# Altium PCB BLE_KB.PcbDoc
Units mil, origin at the board's own origin, x right, y up, seen from the top; angles counter-clockwise.
Board outline 13766.26 x 4875 mil, 2 copper layers (Top Layer, Bottom Layer); 124 components, 42 nets, 632 pads, 114 vias.
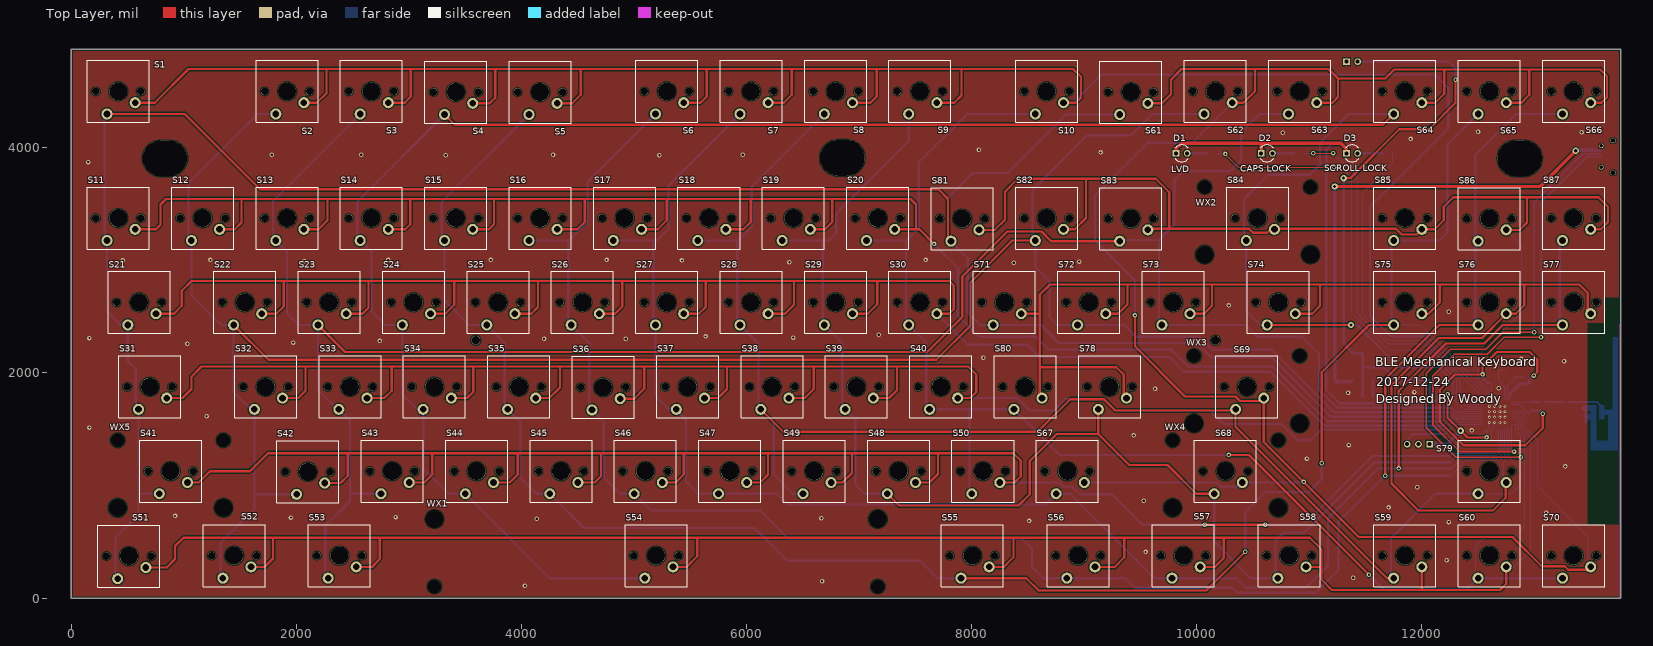
[diagram p0: Top Layer view]
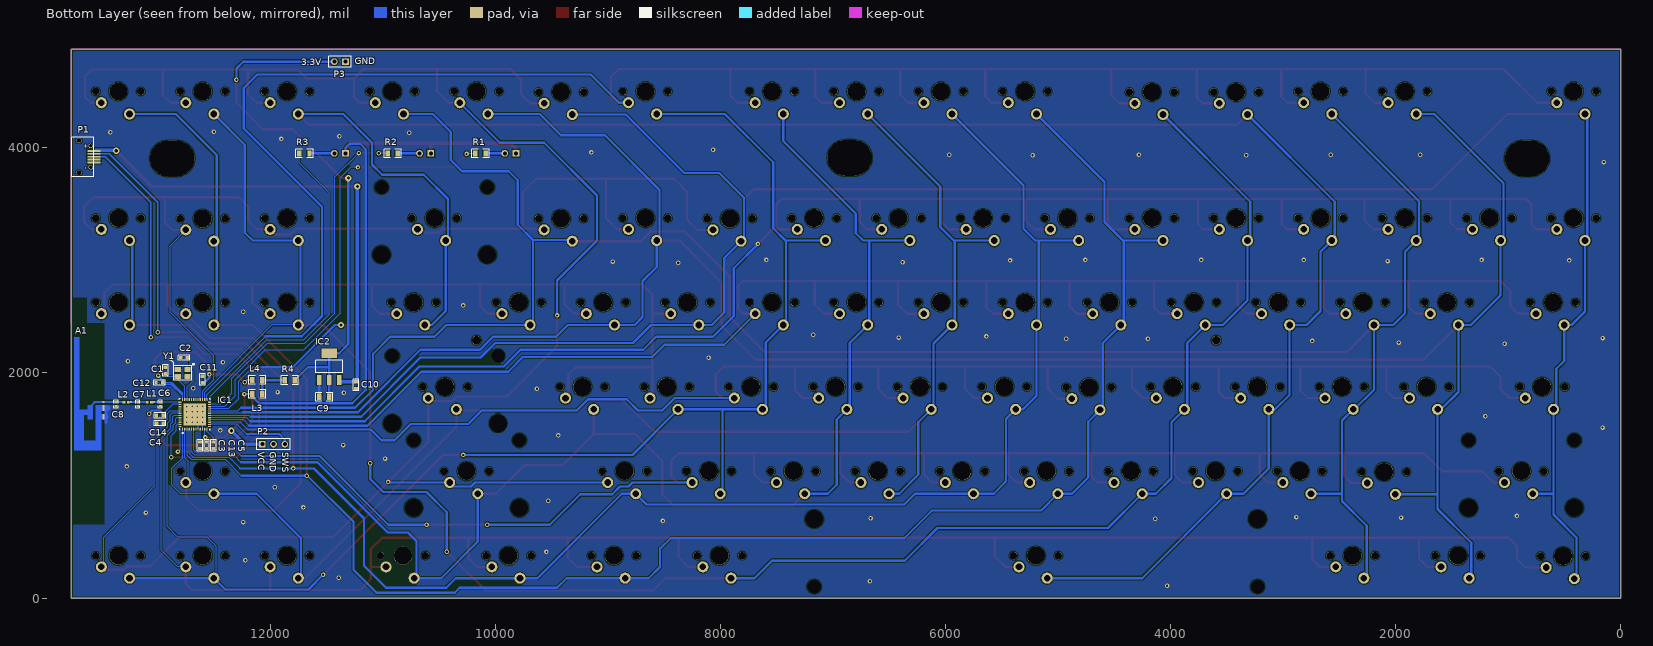
[diagram p1: Bottom Layer view, seen from below]
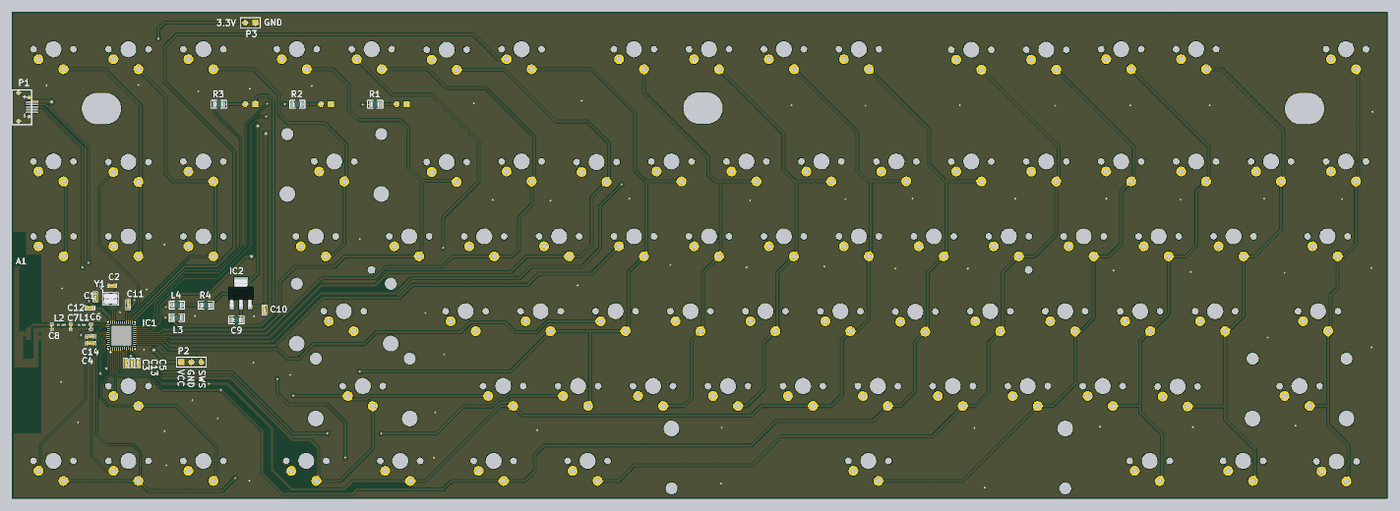
[diagram p2: 3D render of the assembled board from below, using the file's embedded part models]

## Layer stack, top to bottom
Top Solder: solder mask 0.4, Solder Resist, Dk 3.5
Top Layer: signal copper 1.4
Dielectric 1: dielectric 12.6, FR-4, Dk 4.8
Bottom Layer: signal copper 1.4
Bottom Solder: solder mask 0.4, Solder Resist, Dk 3.5

## Board outline
0,0 0,4875 13766.26,4875 13766.26,0

## Design rules (kind name [scope] priority, off if disabled: settings)
Clearance Antenna3 [InNet('NetC6_1')] p1: gap=17.72 ignorepadtopadclearanceinfootprint=FALSE
Clearance Antenna2 [InNet('NetC7_1')] p2: gap=17.72 ignorepadtopadclearanceinfootprint=FALSE
Clearance Antenna [InNet('NetA1_1')] p3: gap=17.72 ignorepadtopadclearanceinfootprint=FALSE
Clearance [All] p4: gap=10 ignorepadtopadclearanceinfootprint=FALSE
PolygonConnect Via [IsVia] p1: connectstyle=Direct reliefconductorwidth=10 reliefentries=4 polygonreliefangle="90 Angle" airgapwidth=10
PolygonConnect [All] p2: connectstyle=Relief reliefconductorwidth=10 reliefentries=4 polygonreliefangle="90 Angle" airgapwidth=10
RoutingVias [All] p1: holewidth=20 width=40 viastyle="Through Hole" minholewidth=10 minwidth=20 maxholewidth=50 maxwidth=100
SolderMaskExpansion [All] p1: expansion=4
Width [All] p1: maxlimit=100 minlimit=10 preferedwidth=10
30 further rules are at their usual default settings.

## Components (designator, comment, footprint, x,y, rotation, side; value= is the part's Value field where it differs from the comment)
A1 "Antenna" ANT_IFA_TI_DN0007 13480.53,1675.85 r90 bottom
C1 "Cap" C603_4MOD 12930.63,2021.85 r90 bottom value=30pF
C2 "Cap" C603_4MOD 12765.63,2136.85 r0 bottom value=30pF
C3 "Cap" C603_4MOD 12625.63,1356.85 r270 bottom value=1uF
C4 "Cap" C603_4MOD 12980.63,1551.85 r180 bottom value=1uF
C5 "Cap" C603_4MOD 12505.63,1356.85 r270 bottom value=10uF
C6 "Cap" C402_4MOD 12975.63,1721.85 r270 bottom value=1.5pF
C7 "Cap" C402_4MOD 13175.63,1721.85 r270 bottom value=1.5pF
C8 "NC" C402_4MOD 13370.63,1721.85 r270 bottom value=1.5pF
C9 "Cap" L0805_POWER_4MOD 11520.63,1786.85 r0 bottom value=10uF
C10 "Cap" C603_4MOD 11240.63,1891.85 r270 bottom value=1uF
C11 "Cap" C603_4MOD 12600.63,1941.85 r90 bottom value=0.1uF
C12 "Cap" C603_4MOD 12985.63,1911.85 r180 bottom value=0.1uF
C13 "Cap" C603_4MOD 12565.63,1356.85 r270 bottom value=0.1uF
C14 "Cap" C603_4MOD 12979.98,1623.5 r0 bottom value=0.1uF
D1 "LED2" 3.8mm 9865.63,3951.85 r0 top
D2 "LED2" 3.8mm 10623.13,3951.85 r0 top
D3 "LED2" 3.8mm 11380.63,3951.85 r0 top
IC1 "TLSR8267F512ET48" QFN7X7-48 12670.63,1631.85 r180 bottom
IC2 "AMS1117-3.3" SOT-223 11475.63,2056.85 r270 bottom
L1 "Inductor" 0402-A 13074.63,1740.85 r0 bottom value=3.3nH
L2 "Inductor" 0402-A 13280.31,1740.85 r0 bottom value=0R
L3 "Inductor" L0805_POWER_4MOD 12115.63,1811.85 r0 bottom value=470R
L4 "Inductor" L0805_POWER_4MOD 12115.63,1936.85 r0 bottom value=470R
P1 "Micro USB" MICROUSB 13598.58,3973.51 r90 bottom
P2 "Download" HDR1X3 12070.63,1366.85 r180 bottom
P3 "Battery" HDR1X2 11330.63,4766.85 r0 bottom
R1 "Res1" L0805_POWER_4MOD 10130.63,3951.85 r180 bottom value=560
R2 "Res1" L0805_POWER_4MOD 10910.63,3951.85 r180 bottom value=560
R3 "Res1" L0805_POWER_4MOD 11695.63,3951.85 r180 bottom value=560
R4 "Res1" L0805_POWER_4MOD 11825.63,1936.85 r180 bottom value=1R
S1 "SW-PB" MX_SW-4 415.63,4501.85 r0 top
S2 "SW-PB" MX_SW-4 1915.63,4501.85 r0 top
S3 "SW-PB" MX_SW-4 2665.63,4501.85 r0 top
S4 "SW-PB" MX_SW-4 3415.63,4496.85 r0 top
S5 "SW-PB" MX_SW-4 4165.63,4496.85 r0 top
S6 "SW-PB" MX_SW-4 5290.63,4501.85 r0 top
S7 "SW-PB" MX_SW-4 6040.63,4501.85 r0 top
S8 "SW-PB" MX_SW-4 6790.63,4501.85 r0 top
S9 "SW-PB" MX_SW-4 7540.63,4501.85 r0 top
S10 "SW-PB" MX_SW-4 8665.63,4501.85 r0 top
S11 "SW-PB" MX_SW-4 415.63,3376.85 r0 top
S12 "SW-PB" MX_SW-4 1165.63,3376.85 r0 top
S13 "SW-PB" MX_SW-4 1915.63,3376.85 r0 top
S14 "SW-PB" MX_SW-4 2665.63,3376.85 r0 top
S15 "SW-PB" MX_SW-4 3415.63,3376.85 r0 top
S16 "SW-PB" MX_SW-4 4165.63,3376.85 r0 top
S17 "SW-PB" MX_SW-4 4915.63,3376.85 r0 top
S18 "SW-PB" MX_SW-4 5665.63,3376.85 r0 top
S19 "SW-PB" MX_SW-4 6415.63,3376.85 r0 top
S20 "SW-PB" MX_SW-4 7165.63,3376.85 r0 top
S21 "SW-PB" MX_SW-4 600.63,2626.85 r0 top
S22 "SW-PB" MX_SW-4 1540.63,2626.85 r0 top
S23 "SW-PB" MX_SW-4 2290.63,2626.85 r0 top
S24 "SW-PB" MX_SW-4 3040.63,2626.85 r0 top
S25 "SW-PB" MX_SW-4 3790.63,2626.85 r0 top
S26 "SW-PB" MX_SW-4 4540.63,2626.85 r0 top
S27 "SW-PB" MX_SW-4 5290.63,2626.85 r0 top
S28 "SW-PB" MX_SW-4 6040.63,2626.85 r0 top
S29 "SW-PB" MX_SW-4 6790.63,2626.85 r0 top
S30 "SW-PB" MX_SW-4 7540.63,2626.85 r0 top
S31 "SW-PB" MX_SW-4 695.63,1876.85 r0 top
S32 "SW-PB" MX_SW-4 1725.63,1876.85 r0 top
S33 "SW-PB" MX_SW-4 2475.63,1876.85 r0 top
S34 "SW-PB" MX_SW-4 3225.63,1876.85 r0 top
S35 "SW-PB" MX_SW-4 3975.63,1876.85 r0 top
S36 "SW-PB" MX_SW-4 4725.63,1871.85 r0 top
S37 "SW-PB" MX_SW-4 5475.63,1876.85 r0 top
S38 "SW-PB" MX_SW-4 6225.63,1876.85 r0 top
S39 "SW-PB" MX_SW-4 6975.63,1876.85 r0 top
S40 "SW-PB" MX_SW-4 7725.63,1876.85 r0 top
S41 "SW-PB" MX_SW-4 880.63,1126.85 r0 top
S42 "SW-PB" MX_SW-4 2100.63,1121.85 r0 top
S43 "SW-PB" MX_SW-4 2850.63,1126.85 r0 top
S44 "SW-PB" MX_SW-4 3600.63,1126.85 r0 top
S45 "SW-PB" MX_SW-4 4350.63,1126.85 r0 top
S46 "SW-PB" MX_SW-4 5100.63,1126.85 r0 top
S47 "SW-PB" MX_SW-4 5850.63,1126.85 r0 top
S48 "SW-PB" MX_SW-4 7350.63,1126.85 r0 top
S49 "SW-PB" MX_SW-4 6600.63,1126.85 r0 top
S50 "SW-PB" MX_SW-4 8100.63,1126.85 r0 top
S51 "SW-PB" MX_SW-4 510.63,371.85 r0 top
S52 "SW-PB" MX_SW-4 1445.63,376.85 r0 top
S53 "SW-PB" MX_SW-4 2380.63,376.85 r0 top
S54 "SW-PB" MX_SW-4 5195.63,376.85 r0 top
S55 "SW-PB" MX_SW-4 8005.63,376.85 r0 top
S56 "SW-PB" MX_SW-4 8945.63,376.85 r0 top
S57 "SW-PB" MX_SW-4 9880.63,376.85 r0 top
S58 "SW-PB" MX_SW-4 10820.63,376.85 r0 top
S59 "SW-PB" MX_SW-4 11850.63,376.85 r0 top
S60 "SW-PB" MX_SW-4 12600.63,376.85 r0 top
S61 "SW-PB" MX_SW-4 9415.63,4496.85 r0 top
S62 "SW-PB" MX_SW-4 10165.63,4501.85 r0 top
S63 "SW-PB" MX_SW-4 10915.63,4501.85 r0 top
S64 "SW-PB" MX_SW-4 11850.63,4501.85 r0 top
S65 "SW-PB" MX_SW-4 12600.63,4501.85 r0 top
S66 "SW-PB" MX_SW-4 13350.63,4501.85 r0 top
S67 "SW-PB" MX_SW-4 8850.63,1126.85 r0 top
S68 "SW-PB" MX_SW-4 10255.63,1126.85 r0 top
S69 "SW-PB" MX_SW-4 10445.63,1876.85 r0 top
S70 "SW-PB" MX_SW-4 13350.63,376.85 r0 top
S71 "SW-PB" MX_SW-4 8290.63,2626.85 r0 top
S72 "SW-PB" MX_SW-4 9040.63,2626.85 r0 top
S73 "SW-PB" MX_SW-4 9790.63,2626.85 r0 top
S74 "SW-PB" MX_SW-4 10725.63,2626.85 r0 top
S75 "SW-PB" MX_SW-4 11850.63,2626.85 r0 top
S76 "SW-PB" MX_SW-4 12600.63,2626.85 r0 top
S77 "SW-PB" MX_SW-4 13350.63,2626.85 r0 top
S78 "SW-PB" MX_SW-4 9225.63,1876.85 r0 top
S79 "SW-PB" MX_SW-4 12600.63,1126.85 r0 top
S80 "SW-PB" MX_SW-4 8475.63,1876.85 r0 top
S81 "SW-PB" MX_SW-4 7915.63,3371.85 r0 top
S82 "SW-PB" MX_SW-4 8665.63,3376.85 r0 top
S83 "SW-PB" MX_SW-4 9415.63,3371.85 r0 top
S84 "SW-PB" MX_SW-4 10540.63,3376.85 r0 top
S85 "SW-PB" MX_SW-4 11850.63,3376.85 r0 top
S86 "SW-PB" MX_SW-4 12600.63,3371.85 r0 top
S87 "SW-PB" MX_SW-4 13350.63,3376.85 r0 top
WX1 "Comment" 1x6.25 5195.63,376.85 r180 top
WX2 "Comment" 1x2 10540.63,3376.85 r0 top
WX3 "Comment" 1x2 10445.63,1876.85 r0 top
WX4 "Comment" 1x2 10255.63,1126.85 r0 top
WX5 "Comment" 1x2 880.63,1126.85 r0 top
Y1 "XTAL" XTAL_SMD_3225(3.2X2.5) 12780.63,1996.85 r0 bottom

## Footprints (in the part's own frame and the unit in brackets; to place one, negate y for a bottom-side part, rotate by r counter-clockwise, add the part's x,y. Pads: shape width x height; smd on the part's side, far side on the other; paste and mask are expansions set on the pad)
1x2 [mil] "stab"
  round 0 hole 120: 0(-470,275) 3(470,275)
  round 0 hole 157: 1(-470,-325) 4(470,-325)
1x6.25 [mil] "stab"
  round 0 hole 120: 0(1970,275) 3(-1970,275)
  round 0 hole 157: 1(1970,-325) 4(-1970,-325)
3.8mm [mm]
  rect 1.5x1.5 hole 0.9: 1(-1.27,0)
  round 1.5 hole 0.9: 2(1.27,0)
  silkscreen extent -1.52,-1.9 1.52,1.9
0402-A [mm] "Chip Inductor, Body 1.0x0.5mm, IPC High Density"
  rect 0.6x0.5 smd: 1(-0.5,0) 2(0.5,0)
  silkscreen extent -1.1,-0.15 -1.1,0.15, body extent -0.55,-0.3 0.55,0.3, height 0.55
ANT_IFA_TI_DN0007 [mm]
  rect 0.45x0.45 smd paste-1 mask-1: 1(1.653,-0.002)
  rect 1.25x0.45 smd paste-1 mask-1: 2(-1.652,0.003) 2(0.333,-0.002)
  Top Layer region: -9.222,6.682 -0.041,6.682 -0.041,4.473 -9.222,4.473
  Top Layer region: -9.222,6.682 16.356,6.682 16.356,5.471 -9.222,5.471
  Top Layer region: -9.222,6.682 -7.036,6.682 -7.036,0.519 -9.222,0.519
  Top Layer region: -9.222,1.801 0.956,1.801 0.956,0.518 -9.222,0.518
  Top Layer region: -1.24,4.473 -0.041,4.473 -0.041,3.315 -1.24,3.315
  Top Layer region: -2.241,3.668 0.959,3.668 0.959,2.418 -2.241,2.418
  Top Layer region: 1.422,2.015 1.885,2.015 1.885,0.176 1.422,0.176
  Top Layer region: -0.293,0.538 0.956,0.538 0.956,0.2 -0.293,0.2
  Top Layer region: -2.276,0.68 -1.027,0.68 -1.027,0.2 -2.276,0.2
  Top Layer lines w0.46: 1.658,2.031 0.823,2.828
C402_4MOD [mil]
  rect 22x24 smd: 1(-19,0) 2(19,0)
  silkscreen extent -36,-18 36,18, body extent -21,-11 19,9, height 20
C603_4MOD [mil]
  rect 30x35 smd: 1(-29.35,1.65) 2(30.65,1.65)
  silkscreen extent -50,-22 52,26, body extent -40,-15 38,16, height 31
HDR1X2 [mm] "Connector; Header; 2 Position"
  rect 1.5x1.5 hole 0.9: 1(0,0)
  round 1.5 hole 0.9: 2(2.54,0)
  silkscreen extent -1.27,-1.27 3.81,1.27
HDR1X3 [mm] "Connector; Header; 3 Position"
  rect 1.5x1.5 hole 0.9: 1(0,0)
  round 1.5 hole 0.9: 2(2.54,0) 3(5.08,0)
  silkscreen extent -1.27,-1.27 6.35,1.27
L0805_POWER_4MOD [mm]
  rect 1x1.4 smd: 1(-1.16,-0.03) 2(1.126,-0.03)
  silkscreen extent -1.95,-1 1.92,0.95, body extent -1.05,-0.6 0.95,0.6, height 1
MICROUSB [mm]
  rect 0.4x3 smd: 1(0,-0.825) 2(-0.65,-0.825) 3(-1.3,-0.825) 4(-1.95,-0.825) 5(-2.6,-0.825)
  round 1 hole 0.8: 6(-3.725,-0.075) 7(1.125,-0.075)
  oval 1x1.3 hole 0.8 slot 1.1 at 90 deg: 8(-4.925,2.575) 9(2.325,2.575)
  silkscreen extent -5.77,-0.76 3.12,4.24
MX_SW-4 [mil] "with Fixation pins  1-Pole"
  round 98.43 hole 59.06: 1(150,-100) 2(-100,-200)
  round 67 hole 67: ""(-200,0) ""(200,0)
  round 160 hole 160: ""(0,0)
  silkscreen extent -276,-276 276,276
QFN7X7-48 [mm] "Quad Flat No Lead; 48 Terminals; Body 7 x 7 mm; Pitch 0.5 mm"
  rect 0.28x0.28 smd: 1(-2.75,-3.515) 2(-2.25,-3.515) 3(-1.75,-3.515) 4(-1.25,-3.515) 5(-0.75,-3.515) 6(-0.25,-3.515) 7(0.25,-3.515) 8(0.75,-3.515) 9(1.25,-3.515) 10(1.75,-3.515) 11(2.25,-3.515) 12(2.75,-3.515) 13(3.515,-2.75) 14(3.515,-2.25) 15(3.515,-1.75) 16(3.515,-1.25) 17(3.515,-0.75) 18(3.515,-0.25) 19(3.515,0.25) 20(3.515,0.75) 21(3.515,1.25) 22(3.515,1.75) 23(3.515,2.25) 24(3.515,2.75) 25(2.75,3.515) 26(2.25,3.515) 27(1.75,3.515) 28(1.25,3.515) 29(0.75,3.515) 30(0.25,3.515) 31(-0.25,3.515) 32(-0.75,3.515) 33(-1.25,3.515) 34(-1.75,3.515) 35(-2.25,3.515) 36(-2.75,3.515) 37(-3.515,2.75) 38(-3.515,2.25) 39(-3.515,1.75) 40(-3.515,1.25) 41(-3.515,0.75) 42(-3.515,0.25) 43(-3.515,-0.25) 44(-3.515,-0.75) 45(-3.515,-1.25) 46(-3.515,-1.75) 47(-3.515,-2.25) 48(-3.515,-2.75)
  oval 0.28x0.66 smd: 1(-2.75,-3.325) 2(-2.25,-3.325) 3(-1.75,-3.325) 4(-1.25,-3.325) 5(-0.75,-3.325) 6(-0.25,-3.325) 7(0.25,-3.325) 8(0.75,-3.325) 9(1.25,-3.325) 10(1.75,-3.325) 11(2.25,-3.325) 12(2.75,-3.325) 25(2.75,3.325) 26(2.25,3.325) 27(1.75,3.325) 28(1.25,3.325) 29(0.75,3.325) 30(0.25,3.325) 31(-0.25,3.325) 32(-0.75,3.325) 33(-1.25,3.325) 34(-1.75,3.325) 35(-2.25,3.325) 36(-2.75,3.325)
  oval 0.66x0.28 smd: 13(3.325,-2.75) 14(3.325,-2.25) 15(3.325,-1.75) 16(3.325,-1.25) 17(3.325,-0.75) 18(3.325,-0.25) 19(3.325,0.25) 20(3.325,0.75) 21(3.325,1.25) 22(3.325,1.75) 23(3.325,2.25) 24(3.325,2.75) 37(-3.325,2.75) 38(-3.325,2.25) 39(-3.325,1.75) 40(-3.325,1.25) 41(-3.325,0.75) 42(-3.325,0.25) 43(-3.325,-0.25) 44(-3.325,-0.75) 45(-3.325,-1.25) 46(-3.325,-1.75) 47(-3.325,-2.25) 48(-3.325,-2.75)
  rect 5x5 smd: 49(0,0)
  silkscreen extent -3.55,-4.33 3.55,3.55
SOT-223 [mm]
  rect 2.2x1 smd: 1(3,-2.3) 2(3,0) 3(3,2.3)
  rect 2.2x3.5 smd: 2(-3,0)
  silkscreen extent -1.4,-3 1.4,3, body extent -3.49,-3.24 3.49,3.24, height 1.64
XTAL_SMD_3225(3.2X2.5) [mm] "XTAL SMD CASE 3225"
  rect 1.4x1.2 smd: 1(-1.15,-0.875) 2(1.05,-0.875) 3(1.05,0.725) 4(-1.15,0.725)
  silkscreen extent -2.69,-2.25 1.97,1.58, body extent -1.68,-1.35 1.53,1.15, height 0.81

## Part data
C1 C2 C3 C4 C5 C6 C7 C9 C10 C11 C12 C13 C14: "Capacitor", LatestRevisionDate=17-Jul-2002, LatestRevisionNote="Re-released for DXP Platform.", PackageDescription="Radial Cap, Thru-Hole; 2 Leads; 0.3 in Pin Spacing", PackageReference=RAD-0.3, Published=8-Jun-2000, Publisher="Altium Limited"
C8: library part Cap, "Capacitor", LatestRevisionDate=17-Jul-2002, LatestRevisionNote="Re-released for DXP Platform.", PackageDescription="Radial Cap, Thru-Hole; 2 Leads; 0.3 in Pin Spacing", PackageReference=RAD-0.3, Published=8-Jun-2000, Publisher="Altium Limited"
D1 D2 D3: "Typical RED, GREEN, YELLOW, AMBER GaAs LED", LatestRevisionDate=17-Jul-2002, LatestRevisionNote="Re-released for DXP Platform.", PackageDescription="SM LED; 2 Flat Leads", PackageReference=3.2X1.6X1.1, PackageVersion=Feb-2002, Published=8-Jun-2000, Publisher="Altium Limited"
IC2: library part "Volt Reg", "Voltage Regulator", LatestRevisionDate=29-May-2009, LatestRevisionNote="IPC-7351 Footprint Added.", PackageDescription="3-Pin Transistor Outline Package 2.54 mm Pitch, 15.1 mm Lead Span", PackageReference=D2PAK, Published=24-Mar-1999, Publisher="Altium Limited"
P1: library part MHDR1X5, "Header, 5-Pin", LatestRevisionDate=17-Jul-2002, LatestRevisionNote="Re-released for DXP Platform.", Publisher="Altium Limited"
P2: library part "Header 3", "Header, 3-Pin", LatestRevisionDate=17-Jul-2002, LatestRevisionNote="Re-released for DXP Platform.", Publisher="Altium Limited"
P3: library part "Header 2", "Header, 2-Pin", LatestRevisionDate=17-Jul-2002, LatestRevisionNote="Re-released for DXP Platform.", Publisher="Altium Limited"
R1 R2 R3 R4: "Resistor", LatestRevisionDate=17-Jul-2002, LatestRevisionNote="Re-released for DXP Platform.", PackageDescription="Axial Device, Thru-Hole; 2 Leads; 0.3 in Pin Spacing", PackageReference=AXIAL-0.3, Published=8-Jun-2000, Publisher="Altium Limited"
S1 S2 S3 S4 S5 S6 S7 S8 S9 S10 S11 S12 S13 S14 S15 S16 S17 S18 S19 S20 S21 S22 S23 S24 S25 S26 S27 S28 S29 S30 S31 S32 S33 S34 S35 S36 S37 S38 S39 S40 S41 S42 S43 S44 S45 S46 S47 S48 S49 S50 S51 S52 S53 S54 S55 S56 S57 S58 S59 S60 S61 S62 S63 S64 S65 S66 S67 S68 S69 S70 S71 S72 S73 S74 S75 S76 S77 S78 S79 S80 S81 S82 S83 S84 S85 S86 S87: "Switch", LatestRevisionDate=17-Jul-2002, LatestRevisionNote="Re-released for DXP Platform.", PackageDescription="Switch; 2 Leads", PackageReference=SPST-2, Published=24-Mar-1999, Publisher="Altium Limited"
Y1: "Crystal Oscillator", LatestRevisionDate=17-Jul-2002, LatestRevisionNote="Re-released for DXP Platform.", PackageDescription="Crystal, Thru-Hole; 2 Leads; Body 3.1 x 8.2 mm (Dia.xH)", PackageReference=R38, Published=8-Jun-2000, Publisher="Altium Limited"
L1 L2 L3 L4: Code_IEC=1005, Code_JEITA=0402, LatestRevisionDate=29-May-2009, LatestRevisionNote="IPC-7351 Footprint Added.", PackageDescription="Chip Inductor", PackageReference=0402-A, Published=8-Jun-2000, Publisher="Altium Limited"

## Free pads (board coordinates)
  oval 393.7x314.96 hole 314.96 slot 393.7 at 0 deg: 0(830.63,3906.85) 1(6850.63,3911.85) 2(12870.63,3906.85)
  round 78.74 hole 78.74: 3(3592.52,2290.4) 4(10167.32,2290.4)

## Via types
v1: diameter 40, hole 20, Top Layer to Bottom Layer, tented both sides, 93 vias
v2: diameter 25.98, hole 12.99, Top Layer to Bottom Layer, tented both sides, 16 vias
v3: diameter 56, hole 28, Top Layer to Bottom Layer, tented both sides, 5 vias

## Nets (pads, with @x,y where several pads share a name; then routed paths per layer and width w, separated by ;. In a path a pad name is that pad's centre, name@x,y a point inside that pad or via, vN(x,y) a via of type N, cw(c..) or ccw(c..) an arc to the next point about the centre after c; other vN are vias at no path point)
AVDD: C11.1 C12.2 C14.1 IC1.28 IC1.36 IC1.38 L4.2 | length 4157.8
  Top Layer w20: v1(12995.63,1976.85) 13025.63,2006.85 13025.63,2121.85 12960.63,2186.85 12665.63,2186.85 12540.63,2061.85 v1(12540.63,1986.85) 12295.63,1986.85 v1(12225.63,1916.85) 12160.63,1851.85 12160.63,1566.85 12370.63,1356.85 12920.63,1356.85 13075.63,1511.85 v1(13075.63,1636.85)
  Bottom Layer w10: C11.1@12609.98,1908.5 12621.42,1897.06 12621.42,1770.24 IC1.28@12621.42,1762.76 ; IC1.36@12778.9,1762.76 12778.9,1770.24 12778.9,1796.85 ; IC1.38@12801.54,1720.44 12809.02,1720.44 12867.05,1720.44 C14.1@12950.63,1636.85 ; C12.2 12872.28,1913.5 12778.9,1820.12 12778.9,1806.85 ; 12778.9,1796.85 12778.9,1806.85 ; 12778.9,1796.85 12878.9,1896.85 12938.33,1896.85 12948.33,1906.85 12878.9,1906.85 12778.9,1806.85
  Bottom Layer w20: L4.2 12204.45,1938.03 v1(12225.63,1916.85) ; v1(12540.63,1986.85) 12540.63,1956.85 12584.98,1912.51 C11.1 ; C14.1@12950.63,1636.85 12980.63,1666.85 13050.63,1666.85 13075.63,1641.85 v1(13075.63,1636.85) ; C12.2 12954.98,1936.2 v1(12995.63,1976.85)
Col1: IC1.18 S1.2 S11.2 S21.2 S31.2 S41.2 S51.2 S61.2 S71.2 S81.2 | length 20637.4
  Top Layer w20: S1.2 1005.63,4301.85 1675.63,3631.85 7705.63,3631.85 7790.63,3546.85 7790.63,3196.85 S81.2
  Bottom Layer w10: 12175.63,1611.85 12185.79,1622.01 12532.24,1622.01 IC1.18@12539.72,1622.01
  Bottom Layer w20: S1.2 295.63,4281.85 295.63,3196.85 S11.2 315.63,2546.85 435.63,2426.85 S21.2 500.63,2106.85 570.63,2036.85 570.63,1701.85 S31.2 595.63,926.85 ; S51.2 390.63,191.85 390.63,536.85 595.63,741.85 595.63,926.85 ; S41.2 595.63,926.85 ; S61.2 8840.63,4296.85 8320.63,3776.85 8010.63,3776.85 7790.63,3556.85 7790.63,3196.85 S81.2 7965.63,3021.85 7965.63,2536.85 8075.63,2426.85 S71.2 8615.63,2426.85 8775.63,2266.85 10000.63,2266.85 10130.63,2136.85 10665.63,2136.85 11190.63,1611.85 12175.63,1611.85
Col2: IC1.19 S2.2 S12.2 S22.2 S32.2 S42.2 S52.2 S62.2 S72.2 S82.2 | length 20491.7
  Top Layer w20: S22.2 1750.63,2116.85 7685.63,2116.85 7990.63,2421.85 7990.63,2806.85 8360.63,3176.85 S82.2
  Bottom Layer w10: 12245.63,1651.85 12255.79,1641.7 12532.24,1641.7 IC1.19@12539.72,1641.7
  Bottom Layer w20: S52.2 1325.63,196.85 1325.63,491.85 1625.63,791.85 1625.63,916.85 ; S2.2 1655.63,4301.85 1040.63,3686.85 1040.63,3201.85 S12.2 1065.63,2691.85 1330.63,2426.85 S22.2 1440.63,1831.85 1595.63,1676.85 S32.2 1625.63,916.85 ; S42.2 1630.63,921.85 1625.63,916.85 ; S62.2 9605.63,4301.85 9415.63,4111.85 9025.63,4111.85 8540.63,3626.85 8540.63,3201.85 S82.2 8565.63,2941.85 8690.63,2816.85 8690.63,2496.85 8760.63,2426.85 S72.2 9355.63,2426.85 9460.63,2321.85 10020.63,2321.85 10135.63,2206.85 10665.63,2206.85 11220.63,1651.85 12245.63,1651.85
Col3: IC1.20 S3.2 S13.2 S23.2 S33.2 S43.2 S53.2 S63.2 S73.2 S83.2 | length 19590.3
  Top Layer w20: S23.2 2430.63,2186.85 7605.63,2186.85 7915.63,2496.85 7915.63,2856.85 8315.63,3256.85 8620.63,3256.85 8705.63,3171.85 S83.2
  Bottom Layer w10: 12260.63,1691.85 12291.1,1661.38 12532.24,1661.38 IC1.20@12539.72,1661.38
  Bottom Layer w20: S53.2 2255.63,201.85 2255.63,641.85 2475.63,861.85 2475.63,926.85 ; S3.2 1790.63,3526.85 1790.63,3201.85 S13.2 1915.63,3076.85 1915.63,2531.85 2020.63,2426.85 S23.2 2190.63,1851.85 2365.63,1676.85 S33.2 2475.63,1576.85 2475.63,926.85 ; S43.2 2475.63,926.85 ; S83.2 9325.63,3181.85 9665.63,3181.85 ; S63.2 10555.63,4301.85 10395.63,4141.85 10395.63,3891.85 10295.63,3791.85 9880.63,3791.85 9800.63,3711.85 9800.63,3316.85 9665.63,3181.85 ; 12260.63,1691.85 11245.63,1691.85 11085.63,1851.85 11085.63,2171.85 10935.63,2321.85 10540.63,2321.85 10435.63,2426.85 S73.2 9665.63,2451.85 9665.63,3181.85
Col4: IC1.21 S4.2 S14.2 S24.2 S34.2 S44.2 S54.2 S64.2 S74.2 S84.2 | length 20024.7
  Top Layer w20: S4.2 3405.63,4206.85 11655.63,4206.85 S64.2 ; S74.2 v3(11370.63,2426.85)
  Bottom Layer w10: 12072.99,2051.85 12155.63,2051.85 12280.63,1926.85 12280.63,1771.85 12371.42,1681.07 12532.24,1681.07 IC1.21@12539.72,1681.07
  Bottom Layer w20: S4.2 2540.63,3521.85 2540.63,3201.85 S14.2 2665.63,3076.85 2665.63,2551.85 2790.63,2426.85 S24.2 2940.63,1806.85 3070.63,1676.85 S34.2 3125.63,1151.85 3350.63,926.85 S44.2 4250.63,176.85 S54.2 ; S74.2 10565.63,2426.85 10440.63,2551.85 S84.2 10420.63,3196.85 10420.63,3546.85 10635.63,3761.85 11005.63,3761.85 11095.63,3851.85 11095.63,4046.85 11350.63,4301.85 S64.2 ; v3(11370.63,2426.85) 11425.63,2426.85 11800.63,2051.85 12072.99,2051.85
Col5: IC1.26 S5.2 S15.2 S25.2 S35.2 S45.2 S55.2 S65.2 S75.2 S85.2 | length 17430.7
  Top Layer w20: S55.2 8485.63,176.85 8595.63,66.85 10085.63,66.85 v1(10430.63,411.85) ; v1(11110.63,1196.85) 11110.63,2006.85 11530.63,2426.85 S75.2
  Bottom Layer w10: S75.2 11985.63,2426.85 12582.05,1830.44 12582.05,1770.24 IC1.26@12582.05,1762.76
  Bottom Layer w20: S5.2 3290.63,3521.85 3290.63,3201.85 S15.2 3315.63,2646.85 3535.63,2426.85 S25.2 3850.63,2266.85 3850.63,1701.85 S35.2 3990.63,1561.85 3990.63,1066.85 4130.63,926.85 S45.2 4555.63,621.85 6070.63,621.85 6360.63,331.85 7540.63,331.85 7695.63,176.85 S55.2 ; v1(10430.63,411.85) 10430.63,761.85 10610.63,941.85 10995.63,941.85 11110.63,1056.85 v1(11110.63,1196.85) ; S75.2 11730.63,2446.85 11730.63,3156.85 S85.2 12155.63,3176.85 12225.63,3246.85 12225.63,4026.85 S65.2
Col6: IC1.3 S6.2 S16.2 S26.2 S36.2 S46.2 S56.2 S66.2 S76.2 S86.2 | length 17903.8
  Top Layer w20: v1(11675.63,1086.85) 11675.63,1946.85 12155.63,2426.85 S76.2
  Bottom Layer w10: 12255.63,1086.85 12395.63,1226.85 12695.63,1226.85 12739.53,1270.75 12739.53,1493.47 IC1.3@12739.53,1500.95
  Bottom Layer w20: S16.2 4420.63,3176.85 ; S6.2 4585.63,3696.85 4585.63,3341.85 4420.63,3176.85 ; 12255.63,1086.85 v1(11675.63,1086.85) 11670.63,1086.85 11260.63,676.85 11260.63,251.85 11055.63,46.85 10360.63,46.85 10315.63,91.85 9450.63,91.85 9365.63,176.85 S56.2 8635.63,176.85 8535.63,276.85 8535.63,441.85 8530.63,441.85 8440.63,531.85 6365.63,531.85 6120.63,776.85 5150.63,776.85 S46.2 4875.63,926.85 4730.63,1071.85 4730.63,1566.85 S36.2 4600.63,1696.85 4600.63,2266.85 S26.2 4415.63,2451.85 4415.63,3171.85 4420.63,3176.85 ; S76.2 12475.63,2451.85 12475.63,3146.85 S86.2 12475.63,3196.85 12475.63,3936.85 12840.63,4301.85 S66.2
Col7: IC1.4 S7.2 S17.2 S27.2 S37.2 S47.2 S57.2 S67.2 S77.2 S87.2 | length 15968.9
  Top Layer w20: v1(11795.63,1151.85) 11795.63,1841.85 12215.63,2261.85 12555.63,2261.85 12720.63,2426.85 S77.2
  Bottom Layer w10: 12265.63,1151.85 12360.63,1246.85 12680.63,1246.85 12719.84,1286.07 12719.84,1493.47 IC1.4@12719.84,1500.95
  Bottom Layer w20: S17.2 5180.63,3176.85 ; S7.2 5305.63,3666.85 5305.63,3281.85 5200.63,3176.85 5180.63,3176.85 ; 12265.63,1151.85 v1(11795.63,1151.85) 11610.63,1151.85 11165.63,706.85 11165.63,286.85 10970.63,91.85 10435.63,91.85 10350.63,176.85 S57.2 9625.63,176.85 8875.63,926.85 S67.2 8655.63,831.85 6365.63,831.85 6270.63,926.85 S47.2 5570.63,926.85 5460.63,1036.85 5460.63,1591.85 S37.2 5310.63,1676.85 5190.63,1796.85 S27.2 5195.63,2426.85 5170.63,2451.85 5170.63,3166.85 5180.63,3176.85 ; S77.2 13225.63,2451.85 13225.63,3151.85 S87.2
Col8: IC1.1 S8.2 S18.2 S28.2 S38.2 S49.2 S59.2 S69.2 S79.2 | length 13175.5
  Top Layer w20: S38.2 6325.63,1476.85 8585.63,1476.85 8875.63,1766.85 9175.63,1766.85 9275.63,1666.85 10335.63,1666.85 S69.2 10345.63,1521.85 11690.63,176.85 S59.2
  Bottom Layer w10: S79.2 12795.63,926.85 12875.63,1006.85 12875.63,1151.85 12778.9,1248.59 IC1.1@12778.9,1493.47
  Bottom Layer w20: S18.2 5925.63,3176.85 ; S49.2 6410.63,926.85 6240.63,1096.85 6240.63,1561.85 S38.2 6105.63,1696.85 6105.63,2261.85 S28.2 5915.63,2451.85 5915.63,3166.85 5925.63,3176.85 ; S8.2 6045.63,3656.85 6045.63,3296.85 5925.63,3176.85 ; S59.2 11725.63,201.85 11725.63,531.85 12120.63,926.85 S79.2
Col9: IC1.5 S9.2 S19.2 S29.2 S39.2 S48.2 S58.2 S68.2 S78.2 | length 12257.3
  Top Layer w20: S48.2 7355.63,821.85 8415.63,821.85 8515.63,921.85 8515.63,1216.85 8755.63,1456.85 9125.63,1456.85 ; S78.2 9125.63,1456.85 ; S68.2 9995.63,926.85 9740.63,1181.85 9400.63,1181.85 9125.63,1456.85
  Bottom Layer w10: 12260.63,1206.85 12320.63,1266.85 12665.63,1266.85 12700.16,1301.38 12700.16,1493.47 IC1.5@12700.16,1500.95
  Bottom Layer w20: S19.2 6675.63,3176.85 ; S48.2 7045.63,926.85 6965.63,1006.85 6965.63,1586.85 S39.2 6850.63,1701.85 6850.63,2266.85 S29.2 6675.63,2441.85 6675.63,3176.85 ; S9.2 7440.63,4061.85 6795.63,3416.85 6795.63,3241.85 6730.63,3176.85 6675.63,3176.85 ; S68.2 10155.63,501.85 10480.63,176.85 S58.2 10700.63,196.85 10700.63,506.85 10775.63,581.85 10955.63,581.85 11580.63,1206.85 12260.63,1206.85
Col10: IC1.44 S10.2 S20.2 S30.2 S40.2 S50.2 S60.2 S70.2 S80.2 | length 12817.5
  Top Layer w20: v1(10285.63,1271.85) 10465.63,1271.85 v1(11530.63,206.85)
  Bottom Layer w10: S60.2 12480.63,196.85 12480.63,461.85 12560.63,541.85 12820.63,541.85 12915.63,636.85 12915.63,1446.85 12860.63,1501.85 12860.63,1536.85 12840.63,1556.85 12840.63,1591.85 12830.16,1602.33 12809.02,1602.33 IC1.44@12801.54,1602.33
  Bottom Layer w20: S20.2 7420.63,3176.85 ; S50.2 7980.63,946.85 7980.63,1671.85 7985.63,1676.85 ; S10.2 7960.63,4301.85 7530.63,3871.85 7530.63,3286.85 7420.63,3176.85 ; v1(10285.63,1271.85) 8780.63,1271.85 S80.2 7985.63,1676.85 ; v1(11530.63,206.85) 11660.63,76.85 12400.63,76.85 S60.2 S70.2 ; 7420.63,3176.85 7415.63,3171.85 7415.63,2451.85 S30.2 7595.63,2271.85 7595.63,1706.85 S40.2 7985.63,1676.85
DVDD: C13.1 D1.1 D2.1 D3.1 IC1.11 L3.2 P2.1 | length 6382.5
  Top Layer w20: v1(12229.45,1813.03) 12229.45,1603.03 v3(12345.63,1486.85) 12405.63,1426.85 v1(12575.63,1426.85)
  Top Layer w30: D1.1 9815.63,3991.85 9865.63,4041.85 10565.63,4041.85 ; D2.1 10573.13,4034.35 10565.63,4041.85 ; D3.1 11330.63,3991.85 11280.63,4041.85 10565.63,4041.85
  Bottom Layer w10: C13.1 12563.98,1415.21 v1(12575.63,1426.85) 12582.05,1433.27 12582.05,1493.47 IC1.11@12582.05,1500.95
  Bottom Layer w20: D3.1 11330.63,4001.85 11295.63,4036.85 11200.63,4036.85 11150.63,3986.85 11150.63,1851.85 11270.63,1731.85 12100.63,1731.85 12159.96,1791.18 L3.2 v1(12229.45,1813.03) v1@12230.63,1811.85
  Bottom Layer w30: P2.1 12225.63,1366.85 v3(12345.63,1486.85)
GND: A1.2 C1.2 C2.2 C3.2 C4.1 C5.2 C6.2 C7.2 C8.2 C9.2 C10.2 C11.2 C12.1 C13.2 C14.2 IC1.8 IC1.10 IC1.49 IC2.1 P1.5 P1.6 P1.7 P1.8 P1.9 P2.2 P3.1 Y1.2 Y1.4 | length 464.3
  Bottom Layer w10: v2(12599.76,1560.99) 12601.73,1559.02 IC1.10@12601.73,1500.95 ; IC1.8@12641.1,1500.95 12641.1,1555.08 v2(12647.01,1560.99)
  Bottom Layer w20: C9.2 11564.96,1937.52 IC2.1 ; 13446.06,1688.94 13460,1675
  Bottom Layer w24: 13460,1560 13460,1610.79 13460,1675
  Bottom Layer w49.21: 13446.06,1688.94 A1.2@13480.43,1688.94 ; 13460,1610.79 A1.2@13480.63,1610.79
  other v1: 4030,110 6670,150 11390,180 12220,335 9545,410 12240,675 8510,685 4135,705 6665,710 1950,715 2880,720 920,730 13105,760 11705,805 9530,865 11960,985 13275,1170 10980,1240 11350,1360 9440,1445 12445,1490 160,1515 1200,1615 11345,1825 11935,1830 9630,1860 12685,1865 12420,2095 13265,2105 12885,2125 8105,2135 1030,2260 1970,2270 2740,2285 4200,2305 4925,2305 160,2310 6415,2315 5635,2325 7175,2340 12240,2545 10285,2600 8375,2980 6380,2985 8955,2990 2070,2995 455,3000 5425,3000 1235,3005 2815,3005 3725,3005 4755,3005 7590,3005 150,3875 3325,3935 5225,3935 1780,3940 2575,3940 4280,3940 5965,3940 9145,3960 8065,3985 11900,4080 11385,4105 10765,4135 13420,4140 12500,4145
  other v2: 12694.25,1560.99 12741.5,1560.99 12599.76,1608.23 12647.01,1608.23 12694.25,1608.23 12741.5,1608.23 12599.76,1655.48 12647.01,1655.48 12694.25,1655.48 12741.5,1655.48 12741.5,1701.54 12599.76,1702.72 12647.01,1702.72 12694.25,1702.72
LED1: IC1.22 R1.1 | length 4096.2
  Top Layer w10: v1(10255.63,3946.85) 10250.63,3946.85 10370.63,3826.85 v1(11220.63,3826.85)
  Bottom Layer w10: R1.1 10180.12,3946.85 v1(10255.63,3946.85) ; v1(11220.63,3826.85) 11285.63,3826.85 11375.63,3736.85 11375.63,2531.85 11705.63,2201.85 12050.63,2201.85 12310.63,1941.85 12310.63,1796.85 12406.73,1700.75 12532.24,1700.75 IC1.22@12539.72,1700.75
LED2: IC1.23 R2.1 | length 3300.2
  Top Layer w10: v1(11035.63,3951.85) 11033.13,3954.35 v1(11213.13,3954.35)
  Bottom Layer w10: R2.1 11034.45,3950.67 v1(11035.63,3951.85) ; v1(11213.13,3954.35) 11425.63,3741.85 11425.63,2531.85 11695.63,2261.85 12030.63,2261.85 12340.63,1951.85 12340.63,1821.85 12442.05,1720.44 12532.24,1720.44 IC1.23@12539.72,1720.44
LED3: IC1.24 R3.1 | length 2959
  Bottom Layer w10: R3.1 11741.3,3867.52 11475.63,3601.85 11475.63,2521.85 11705.63,2291.85 12035.63,2291.85 12532.24,1795.24 12532.24,1740.12 IC1.24@12539.72,1740.12
NetA1_1: A1.1 C8.1 L2.2 | length 180.5
  Bottom Layer w18: L2.2 C8.1 13480.37,1740.85 A1.1
NetC1_1: C1.1 IC1.35 Y1.3 | length 351.9
  Bottom Layer w10: IC1.35@12759.21,1762.76 12759.21,1770.24 12759.21,1880.44 12821.97,1943.19 Y1.3 12908.08,1968.31 C1.1
NetC2_1: C2.1 IC1.34 Y1.1 | length 433.5
  Bottom Layer w10: C2.1 12736.28,2032.23 Y1.1 12705.08,2031.3 12685.63,2011.85 12685.63,1931.85 12739.53,1877.96 12739.53,1770.24 IC1.34@12739.53,1762.76
NetC3_1: C3.1 IC1.9 | length 115.8
  Bottom Layer w10: IC1.9@12621.42,1500.95 12621.42,1493.47 12621.42,1388.77 C3.1
NetC4_2: C4.2 IC1.41 | length 222.4
  Bottom Layer w10: IC1.41@12801.54,1661.38 12809.02,1661.38 12891.1,1661.38 12915.63,1636.85 12915.63,1586.85 12948.98,1553.5 C4.2
NetC5_1: C5.1 IC1.12 | length 138.9
  Bottom Layer w10: C5.1 12503.98,1425.21 12562.36,1483.59 12562.36,1493.47 IC1.12@12562.36,1500.95
NetC6_1: C6.1 IC1.37 L1.1 | length 253.7
  Bottom Layer w10: IC1.37@12801.54,1740.12 12809.02,1740.12 12974.9,1740.12 C6.1
  Bottom Layer w18: C6.1 L1.1
NetC7_1: C7.1 L1.2 L2.1 | length 166.3
  Bottom Layer w18: L1.2 C7.1 L2.1
NetC9_1: C9.1 IC2.2 P3.2 R4.2 | length 4892.3
  Top Layer w20: v3(11305.63,3731.85) 11365.63,3731.85 11800.63,4166.85 12065.63,4166.85 12300.63,4401.85 v1(12300.63,4606.85)
  Bottom Layer w20: v3(11305.63,3731.85) 11305.63,2256.85 11387.52,2174.96 11475.63,2174.96 11475.63,2051.85 ; P3.2 12240.63,4766.85 12300.63,4706.85 v1(12300.63,4606.85) ; C9.1 11475.63,1788.7 11475.63,1938.74 11475.63,2051.85 ; R4.2 11665.12,2051.85 11475.63,2051.85
NetD1_2: D1.2 R1.2 | length 171.2
  Bottom Layer w20: D1.2 10085.12,3951.85 R1.2
NetD2_2: D2.2 R2.2 | length 193.7
  Bottom Layer w20: D2.2 10865.12,3951.85 R2.2
NetD3_2: D3.2 R3.2 | length 221.2
  Bottom Layer w20: D3.2 11650.12,3951.85 R3.2
NetL3_1: L3.1 L4.1 R4.1 | length 324.6
  Bottom Layer w20: R4.1 12067.6,1935.67 L4.1 L3.1
Row1: IC1.25 S1.1 S2.1 S3.1 S4.1 S5.1 S6.1 S7.1 S8.1 S9.1 S10.1 | length 19929
  Top Layer w20: S1.1 740.63,4401.85 1040.63,4701.85 2265.63,4701.85 ; S2.1 2180.63,4401.85 2265.63,4486.85 2265.63,4701.85 ; S3.1 2960.63,4401.85 3015.63,4456.85 3015.63,4701.85 ; S4.1 3715.63,4396.85 3765.63,4446.85 3765.63,4701.85 ; S5.1 4450.63,4396.85 4525.63,4471.85 4525.63,4701.85 ; S6.1 5590.63,4401.85 5645.63,4456.85 5645.63,4701.85 ; S7.1 6330.63,4401.85 6400.63,4471.85 6400.63,4701.85 ; S8.1 7100.63,4401.85 7155.63,4456.85 7155.63,4701.85 ; S9.1 7845.63,4401.85 7910.63,4466.85 7910.63,4701.85 ; S10.1 8925.63,4401.85 8970.63,4446.85 8970.63,4631.85 8900.63,4701.85 7910.63,4701.85 ; 2265.63,4701.85 3015.63,4701.85 ; 3015.63,4701.85 3765.63,4701.85 ; 3765.63,4701.85 4525.63,4701.85 ; 4525.63,4701.85 5645.63,4701.85 ; 5645.63,4701.85 6400.63,4701.85 ; 6400.63,4701.85 7155.63,4701.85 ; 7155.63,4701.85 7910.63,4701.85
  Bottom Layer w10: 12040.63,2326.85 12562.36,1805.12 12562.36,1770.24 IC1.25@12562.36,1762.76
  Bottom Layer w20: S10.1 8900.63,4401.85 9150.63,4651.85 12115.63,4651.85 12235.63,4531.85 12235.63,4171.85 11540.63,3476.85 11540.63,2506.85 11720.63,2326.85 12040.63,2326.85
Row2: IC1.17 S11.1 S12.1 S13.1 S14.1 S15.1 S16.1 S17.1 S18.1 S19.1 S20.1 | length 17134.1
  Top Layer w20: S11.1 750.63,3276.85 790.63,3316.85 790.63,3496.85 840.63,3546.85 1510.63,3546.85 ; S12.1 1450.63,3276.85 1510.63,3336.85 1510.63,3546.85 ; S13.1 2195.63,3276.85 2275.63,3356.85 2275.63,3546.85 ; S14.1 2965.63,3276.85 3010.63,3321.85 3010.63,3546.85 ; S15.1 3710.63,3276.85 3755.63,3321.85 3755.63,3546.85 ; S16.1 4495.63,3276.85 4560.63,3341.85 4560.63,3546.85 ; S17.1 5210.63,3276.85 5290.63,3356.85 5290.63,3546.85 ; S18.1 5970.63,3276.85 6035.63,3341.85 6035.63,3546.85 ; S19.1 6695.63,3276.85 6760.63,3341.85 6760.63,3546.85 ; S20.1 7505.63,3276.85 ; v1@7665.63,3151.85 v1(7665.63,3146.85) 7535.63,3276.85 7505.63,3276.85 ; 1510.63,3546.85 2275.63,3546.85 ; 2275.63,3546.85 3010.63,3546.85 ; 3010.63,3546.85 3755.63,3546.85 ; 3755.63,3546.85 4560.63,3546.85 ; 4560.63,3546.85 5290.63,3546.85 ; 5290.63,3546.85 6035.63,3546.85 ; 6035.63,3546.85 6760.63,3546.85 ; 6760.63,3546.85 7455.63,3546.85 7505.63,3496.85 7505.63,3276.85
  Bottom Layer w10: 12179.69,1571.85 12210.16,1602.33 12532.24,1602.33 IC1.17@12539.72,1602.33
  Bottom Layer w20: v1(7665.63,3146.85) 7880.63,2931.85 7880.63,2506.85 8065.63,2321.85 8570.63,2321.85 8685.63,2206.85 9775.63,2206.85 9925.63,2056.85 10675.63,2056.85 11160.63,1571.85 12179.69,1571.85
Row3: IC1.16 S21.1 S22.1 S23.1 S24.1 S25.1 S26.1 S27.1 S28.1 S29.1 S30.1 | length 16622.4
  Top Layer w20: S21.1 910.63,2526.85 980.63,2596.85 980.63,2731.85 1065.63,2816.85 1885.63,2816.85 ; S22.1 1820.63,2526.85 1885.63,2591.85 1885.63,2816.85 ; S23.1 2585.63,2526.85 2640.63,2581.85 2640.63,2816.85 ; S24.1 3320.63,2526.85 3400.63,2606.85 3400.63,2816.85 ; S25.1 4085.63,2526.85 4145.63,2586.85 4145.63,2816.85 ; S26.1 4830.63,2526.85 4895.63,2591.85 4895.63,2816.85 ; S27.1 5575.63,2526.85 5635.63,2586.85 5635.63,2816.85 ; S28.1 6340.63,2526.85 6420.63,2606.85 6420.63,2816.85 ; S29.1 7075.63,2526.85 7160.63,2611.85 7160.63,2816.85 ; S30.1 7800.63,2526.85 7840.63,2566.85 7840.63,2776.85 7800.63,2816.85 7160.63,2816.85 ; 1885.63,2816.85 2640.63,2816.85 ; 2640.63,2816.85 3400.63,2816.85 ; 3400.63,2816.85 4145.63,2816.85 ; 4145.63,2816.85 4895.63,2816.85 ; 4895.63,2816.85 5635.63,2816.85 ; 5635.63,2816.85 6420.63,2816.85 ; 6420.63,2816.85 7160.63,2816.85
  Bottom Layer w10: 12185.63,1531.85 12236.42,1582.64 12532.24,1582.64 IC1.16@12539.72,1582.64
  Bottom Layer w20: S30.1 7965.63,2251.85 8495.63,2251.85 8605.63,2141.85 9755.63,2141.85 9885.63,2011.85 10655.63,2011.85 11135.63,1531.85 12185.63,1531.85
Row4: IC1.15 S31.1 S32.1 S33.1 S34.1 S35.1 S36.1 S37.1 S38.1 S39.1 S40.1 | length 16289.7
  Top Layer w20: S31.1 985.63,1776.85 1065.63,1856.85 1065.63,1966.85 1155.63,2056.85 2080.63,2056.85 ; S32.1 2015.63,1776.85 2080.63,1841.85 2080.63,2056.85 ; S33.1 2780.63,1776.85 2845.63,1841.85 2845.63,2056.85 ; S34.1 3515.63,1776.85 3570.63,1831.85 3570.63,2056.85 ; S35.1 4245.63,1776.85 4340.63,1871.85 4340.63,2056.85 ; S36.1 5000.63,1771.85 5090.63,1861.85 5090.63,2056.85 ; S37.1 5745.63,1776.85 5825.63,1856.85 5825.63,2056.85 ; S38.1 6515.63,1776.85 6595.63,1856.85 6595.63,2056.85 ; S39.1 7265.63,1776.85 7335.63,1846.85 7335.63,2056.85 ; S40.1 7985.63,1776.85 8040.63,1831.85 8040.63,1986.85 7970.63,2056.85 7335.63,2056.85 ; 2080.63,2056.85 2845.63,2056.85 ; 2845.63,2056.85 3570.63,2056.85 ; 3570.63,2056.85 4340.63,2056.85 ; 4340.63,2056.85 5090.63,2056.85 ; 5090.63,2056.85 5825.63,2056.85 ; 5825.63,2056.85 6595.63,2056.85 ; 6595.63,2056.85 7335.63,2056.85
  Bottom Layer w10: 12200.63,1496.85 12266.73,1562.96 12532.24,1562.96 IC1.15@12539.72,1562.96
  Bottom Layer w20: S40.1 8405.63,1776.85 8515.63,1666.85 8730.63,1666.85 8830.63,1766.85 9175.63,1766.85 9275.63,1666.85 10120.63,1666.85 10240.63,1546.85 10750.63,1546.85 10895.63,1401.85 11010.63,1401.85 11105.63,1496.85 12200.63,1496.85
Row5: IC1.6 S41.1 S42.1 S43.1 S44.1 S45.1 S46.1 S47.1 S48.1 S49.1 S50.1 | length 16284.3
  Top Layer w20: S41.1 1130.63,1026.85 1230.63,1126.85 1585.63,1126.85 1745.63,1286.85 2455.63,1286.85 ; S42.1 2390.63,1021.85 2455.63,1086.85 2455.63,1286.85 ; S43.1 3135.63,1026.85 3205.63,1096.85 3205.63,1286.85 ; S44.1 3895.63,1026.85 3965.63,1096.85 3965.63,1286.85 ; S45.1 4650.63,1026.85 4705.63,1081.85 4705.63,1286.85 ; S46.1 5370.63,1026.85 5440.63,1096.85 5440.63,1286.85 ; S47.1 6120.63,1026.85 6190.63,1096.85 6190.63,1286.85 ; S49.1 6850.63,1026.85 6935.63,1111.85 6935.63,1286.85 ; S48.1 7625.63,1026.85 7700.63,1101.85 7700.63,1286.85 ; S50.1 8380.63,1026.85 8435.63,1081.85 8435.63,1221.85 8370.63,1286.85 7700.63,1286.85 ; v1(10070.63,651.85) v1(10610.63,651.85) ; 2455.63,1286.85 3205.63,1286.85 ; 3205.63,1286.85 3965.63,1286.85 ; 3965.63,1286.85 4705.63,1286.85 ; 4705.63,1286.85 5440.63,1286.85 ; 5440.63,1286.85 6190.63,1286.85 ; 6190.63,1286.85 6935.63,1286.85 ; 6935.63,1286.85 7700.63,1286.85
  Bottom Layer w10: 12255.63,1261.85 12280.63,1286.85 12650.63,1286.85 12680.63,1316.85 12680.63,1500.79 IC1.6@12680.47,1500.95
  Bottom Layer w20: S50.1 8780.63,1026.85 8815.63,991.85 8890.63,991.85 8960.63,921.85 9245.63,921.85 9515.63,651.85 v1(10070.63,651.85) ; v1(10610.63,651.85) 10950.63,651.85 11560.63,1261.85 12255.63,1261.85
Row6: IC1.43 S51.1 S52.1 S53.1 S54.1 S55.1 S56.1 S57.1 S58.1 S59.1 S60.1 | length 17287.6
  Top Layer w20: S51.1 845.63,271.85 920.63,346.85 920.63,461.85 995.63,536.85 1790.63,536.85 ; S52.1 1715.63,276.85 1790.63,351.85 1790.63,536.85 ; S53.1 2670.63,276.85 2740.63,346.85 2740.63,536.85 ; S54.1 5465.63,276.85 5560.63,371.85 5560.63,536.85 ; S55.1 8285.63,276.85 8370.63,361.85 8370.63,536.85 ; S56.1 9270.63,276.85 9355.63,361.85 9355.63,536.85 ; S57.1 10160.63,276.85 10240.63,356.85 10240.63,536.85 ; S58.1 11105.63,276.85 ; S59.1 12000.63,71.85 ; S60.1 12750.63,126.85 12695.63,71.85 12000.63,71.85 ; 1790.63,536.85 2740.63,536.85 ; 2740.63,536.85 5560.63,536.85 ; 5560.63,536.85 8370.63,536.85 ; 8370.63,536.85 9355.63,536.85 ; 9355.63,536.85 10240.63,536.85 ; 10240.63,536.85 11005.63,536.85 11105.63,436.85 11105.63,276.85 ; 11105.63,276.85 11105.63,166.85 11200.63,71.85 12000.63,71.85
  Bottom Layer w10: S60.1 12820.63,276.85 12970.63,426.85 12970.63,1421.85 12885.63,1506.85 12885.63,1546.85 12865.63,1566.85 12865.63,1611.85 12855.47,1622.01 12809.02,1622.01 IC1.43@12801.54,1622.01
Row7: IC1.42 S61.1 S62.1 S63.1 S64.1 S65.1 S66.1 S67.1 S68.1 S69.1 S70.1 | length 18367.8
  Top Layer w20: v1(9450.63,2511.85) 9450.63,2236.85 9895.63,1791.85 10345.63,1791.85 10385.63,1751.85 10570.63,1751.85 S69.1 10595.63,1386.85 v1(10950.63,1031.85) 11440.63,541.85 12805.63,541.85 13065.63,281.85 13270.63,281.85 13300.63,251.85 13475.63,251.85 S70.1 ; S61.1 9690.63,4396.85 9770.63,4476.85 9770.63,4606.85 9865.63,4701.85 10518.13,4701.85 ; S62.1 10415.63,4401.85 10518.13,4504.35 10518.13,4701.85 ; S68.1@10385.63,1046.85 S68.1 ; S63.1 11205.63,4401.85 11255.63,4451.85 11255.63,4616.85 ; S64.1 12120.63,4401.85 12200.63,4481.85 12200.63,4696.85 ; S65.1 12885.63,4401.85 12955.63,4471.85 12955.63,4696.85 ; S66.1 13595.63,4401.85 13645.63,4451.85 13645.63,4636.85 13585.63,4696.85 12955.63,4696.85 ; 10518.13,4701.85 11170.63,4701.85 11255.63,4616.85 ; 11255.63,4616.85 11675.63,4616.85 11755.63,4696.85 12200.63,4696.85 ; 12200.63,4696.85 12955.63,4696.85
  Bottom Layer w10: IC1.42@12801.54,1641.7 12809.02,1641.7 12875.79,1641.7 12890.63,1626.85 12890.63,1576.85 12910.63,1556.85 12910.63,1521.85 13030.63,1401.85 13030.63,991.85 13480.63,541.85 13480.63,296.85 S70.1
  Bottom Layer w20: S67.1 10180.63,1026.85 10215.63,991.85 10370.63,991.85 S68.1 10945.63,1026.85 v1(10950.63,1031.85) ; v1(9450.63,2511.85) 9450.63,2821.85 9095.63,3176.85 9095.63,3576.85 9565.63,4046.85 9960.63,4046.85 S62.1 ; S69.1@10575.63,1796.85 S69.1
Row8: IC1.2 S71.1 S72.1 S73.1 S74.1 S75.1 S76.1 S77.1 S78.1 S79.1 S80.1 | length 13166.3
  Top Layer w20: S71.1 8605.63,2526.85 ; S80.1 8605.63,1796.85 8605.63,2051.85 ; S72.1 9300.63,2526.85 9385.63,2611.85 9385.63,2786.85 ; S78.1 9350.63,1801.85 9350.63,1986.85 9285.63,2051.85 8605.63,2051.85 ; S73.1 10065.63,2526.85 10135.63,2596.85 10135.63,2786.85 ; S74.1 11025.63,2526.85 11095.63,2596.85 11095.63,2786.85 ; S75.1 12060.63,2526.85 12160.63,2626.85 12160.63,2786.85 ; S79.1 12745.63,1021.85 12745.63,891.85 12630.63,776.85 11970.63,776.85 11730.63,1016.85 11730.63,1891.85 12150.63,2311.85 12535.63,2311.85 S76.1 12835.63,2526.85 12910.63,2601.85 12910.63,2786.85 ; S77.1 13475.63,2551.85 13475.63,2711.85 13400.63,2786.85 12910.63,2786.85 ; 8605.63,2051.85 8605.63,2526.85 ; 8605.63,2526.85 8605.63,2696.85 8695.63,2786.85 9385.63,2786.85 ; 9385.63,2786.85 10135.63,2786.85 ; 10135.63,2786.85 11095.63,2786.85 ; 11095.63,2786.85 12160.63,2786.85 ; 12160.63,2786.85 12910.63,2786.85
  Bottom Layer w10: S79.1 12730.63,1046.85 12730.63,1216.85 12759.21,1245.44 12759.21,1493.47 IC1.2@12759.21,1500.95
Row9: IC1.27 S81.1 S82.1 S83.1 S84.1 S85.1 S86.1 S87.1 | length 9894
  Top Layer w20: S81.1 8205.63,3271.85 8295.63,3361.85 8295.63,3611.85 8410.63,3726.85 9015.63,3726.85 ; S82.1 8915.63,3276.85 9015.63,3376.85 9015.63,3726.85 ; S83.1 9575.63,3281.85 9755.63,3281.85 ; S86.1 12870.63,3271.85 12935.63,3336.85 12935.63,3561.85 ; S87.1 13590.63,3276.85 13655.63,3341.85 13655.63,3476.85 13570.63,3561.85 12935.63,3561.85 ; 9015.63,3726.85 9635.63,3726.85 9755.63,3606.85 9755.63,3281.85 ; 9755.63,3281.85 10465.63,3281.85 10500.63,3246.85 10625.63,3246.85 10655.63,3276.85 S84.1 10695.63,3281.85 11770.63,3281.85 11820.63,3231.85 11955.63,3231.85 S85.1 12115.63,3276.85 12195.63,3356.85 12195.63,3476.85 12280.63,3561.85 12935.63,3561.85
  Bottom Layer w10: IC1.27@12601.73,1770.24 12601.73,1840.75 12500.63,1941.85 12500.63,2151.85 12890.63,2541.85 12890.63,3131.85 S86.1
SWS: IC1.14 P2.3 | length 765.6
  Bottom Layer w10: 12210.63,1456.85 12297.05,1543.27 12532.24,1543.27 IC1.14@12539.72,1543.27
  Bottom Layer w20: P2.3 11870.63,1406.85 11920.63,1456.85 12210.63,1456.85
USB_DM: IC1.47 P1.2 | length 4812.9
  Top Layer w15: v1(12880.63,1251.85) 12300.63,1251.85 12040.63,1511.85 12040.63,1996.85 12255.63,2211.85 12570.63,2211.85 12720.63,2361.85 v1(13000.63,2361.85)
  Bottom Layer w10: IC1.47@12801.54,1543.27 12809.02,1543.27 12824.21,1543.27 12835.63,1531.85 12835.63,1486.85 12880.63,1441.85 v1(12880.63,1251.85)
  Bottom Layer w15: v1(13000.63,2361.85) 13000.63,3516.85 13431.69,3947.92 P1.2 P1.2@13598.58,3947.92
USB_DP: IC1.48 P1.3 | length 4493.7
  Top Layer w15: v1(12820.63,1301.85) 12335.63,1301.85 12100.63,1536.85 12100.63,1976.85 12290.63,2166.85 12580.63,2166.85 12730.63,2316.85 v1(13060.63,2316.85)
  Bottom Layer w10: IC1.48@12801.54,1523.59 12801.54,1320.95 v1(12820.63,1301.85)
  Bottom Layer w15: v1(13060.63,2316.85) 13060.63,3516.85 13466.1,3922.33 P1.3 P1.3@13598.58,3922.33
VBUS: C10.1 IC2.3 P1.1 | length 4605.4
  Top Layer w30: v3(11225.63,3656.85) 13050.63,3656.85 v3(13368.86,3975.08)
  Bottom Layer w15: v3(13368.86,3975.08) 13380.63,3986.85 13555.63,3986.85 P1.1@13568.98,3973.51 ; v3@13370.43,3973.51 P1.1@13598.58,3973.51
  Bottom Layer w20: IC2.3@11368.84,1922.51 IC2.3
  Bottom Layer w30: v3(11225.63,3656.85) 11225.63,1948.16 11240.63,1933.16 11240.63,1922.51 IC2.3@11368.84,1922.51
pads on no net: IC1.7 IC1.13 IC1.29 IC1.30 IC1.31 IC1.32 IC1.33 IC1.39 IC1.40 IC1.45 IC1.46 P1.4 S1. S2. S3. S4. S5. S6. S7. S8. S9. S10. S11. S12. S13. S14. S15. S16. S17. S18. S19. S20. S21. S22. S23. S24. S25. S26. S27. S28. S29. S30. S31. S32. S33. S34. S35. S36. S37. S38. S39. S40. S41. S42. S43. S44. S45. S46. S47. S48. S49. S50. S51. S52. S53. S54. S55. S56. S57. S58. S59. S60. S61. S62. S63. S64. S65. S66. S67. S68. S69. S70. S71. S72. S73. S74. S75. S76. S77. S78. S79. S80. S81. S82. S83. S84. S85. S86. S87. WX1.0 WX1.1 WX1.3 WX1.4 WX2.0 WX2.1 WX2.3 WX2.4 WX3.0 WX3.1 WX3.3 WX3.4 WX4.0 WX4.1 WX4.3 WX4.4 WX5.0 WX5.1 WX5.3 WX5.4

## Polygon pours and split planes (outlines as drawn)
GND on Top Layer "Bottom Layer-No Net" (solid, remove dead copper, pour order 8): 13765.63,0 13766.26,0.63 13766.26,4874.37 13765.63,4875 0,4875 0,0
GND on Bottom Layer "Bottom Layer-No Net" (solid, remove dead copper, pour order 10): 0,0 0,4875 13766.26,4875 13766.26,0.63 13765.63,0

## Keep-outs
Keep-Out Layer:
  lines w10: 13765.63,4875 0,4875 0,0 13765.63,0 13766.26,4875

## Other copper
Top Layer:
  pour cut-out: 13471.63,651.85 13765.63,651.85 13765.63,2446.85 13471.63,2446.85
  pour cut-out: 13765.63,2671.85 13625.63,2671.85 13625.63,2446.85 13765.63,2446.85
Bottom Layer:
  pour cut-out: 13472,651.85 13765.63,651.85 13765.63,2446.85 13472,2446.85
  pour cut-out: 13765.63,2671.85 13625.63,2671.85 13625.63,2446.85 13765.63,2446.85

## Silkscreen, mask and mechanical layers (free items; w line width, h text height)
Top Overlay:
  text "SCROLL LOCK" at 11135,3795 h60
  text "CAPS LOCK" at 10385,3790 h60
  text "LVD" at 9775,3785 h60
  text "BLE Mechanical Keyboard" at 11585,2060 h80
  text "2017-12-24" at 11595,1880 h80
  text "Designed By Woody" at 11590,1730 h80
Bottom Overlay:
  lines w10: 12858.39,2064.77 12858.39,2089.61 12875.63,2106.85
  text "GND" at 11250.63,4741.85 h60
  text "3.3V" at 11725.63,4736.85 h60
  text "GND" at 12005,1300 h60 r90
  text "VCC" at 12105,1300 h60 r90
  text "SWS" at 11895,1295 h60 r90
Mechanical 1:
  drawing of 557 lines, arcs and shapes, not listed

## Text inside footprints (layer, text, board x,y; h text height)
P1: Bottom Overlay "-" at 13623.58,3808.51 h40 r270; Bottom Overlay "+" at 13623.58,3993.51 h40 r270